# EAGLE board educ-8 (EAGLE 6.6.0), part 1 of 5
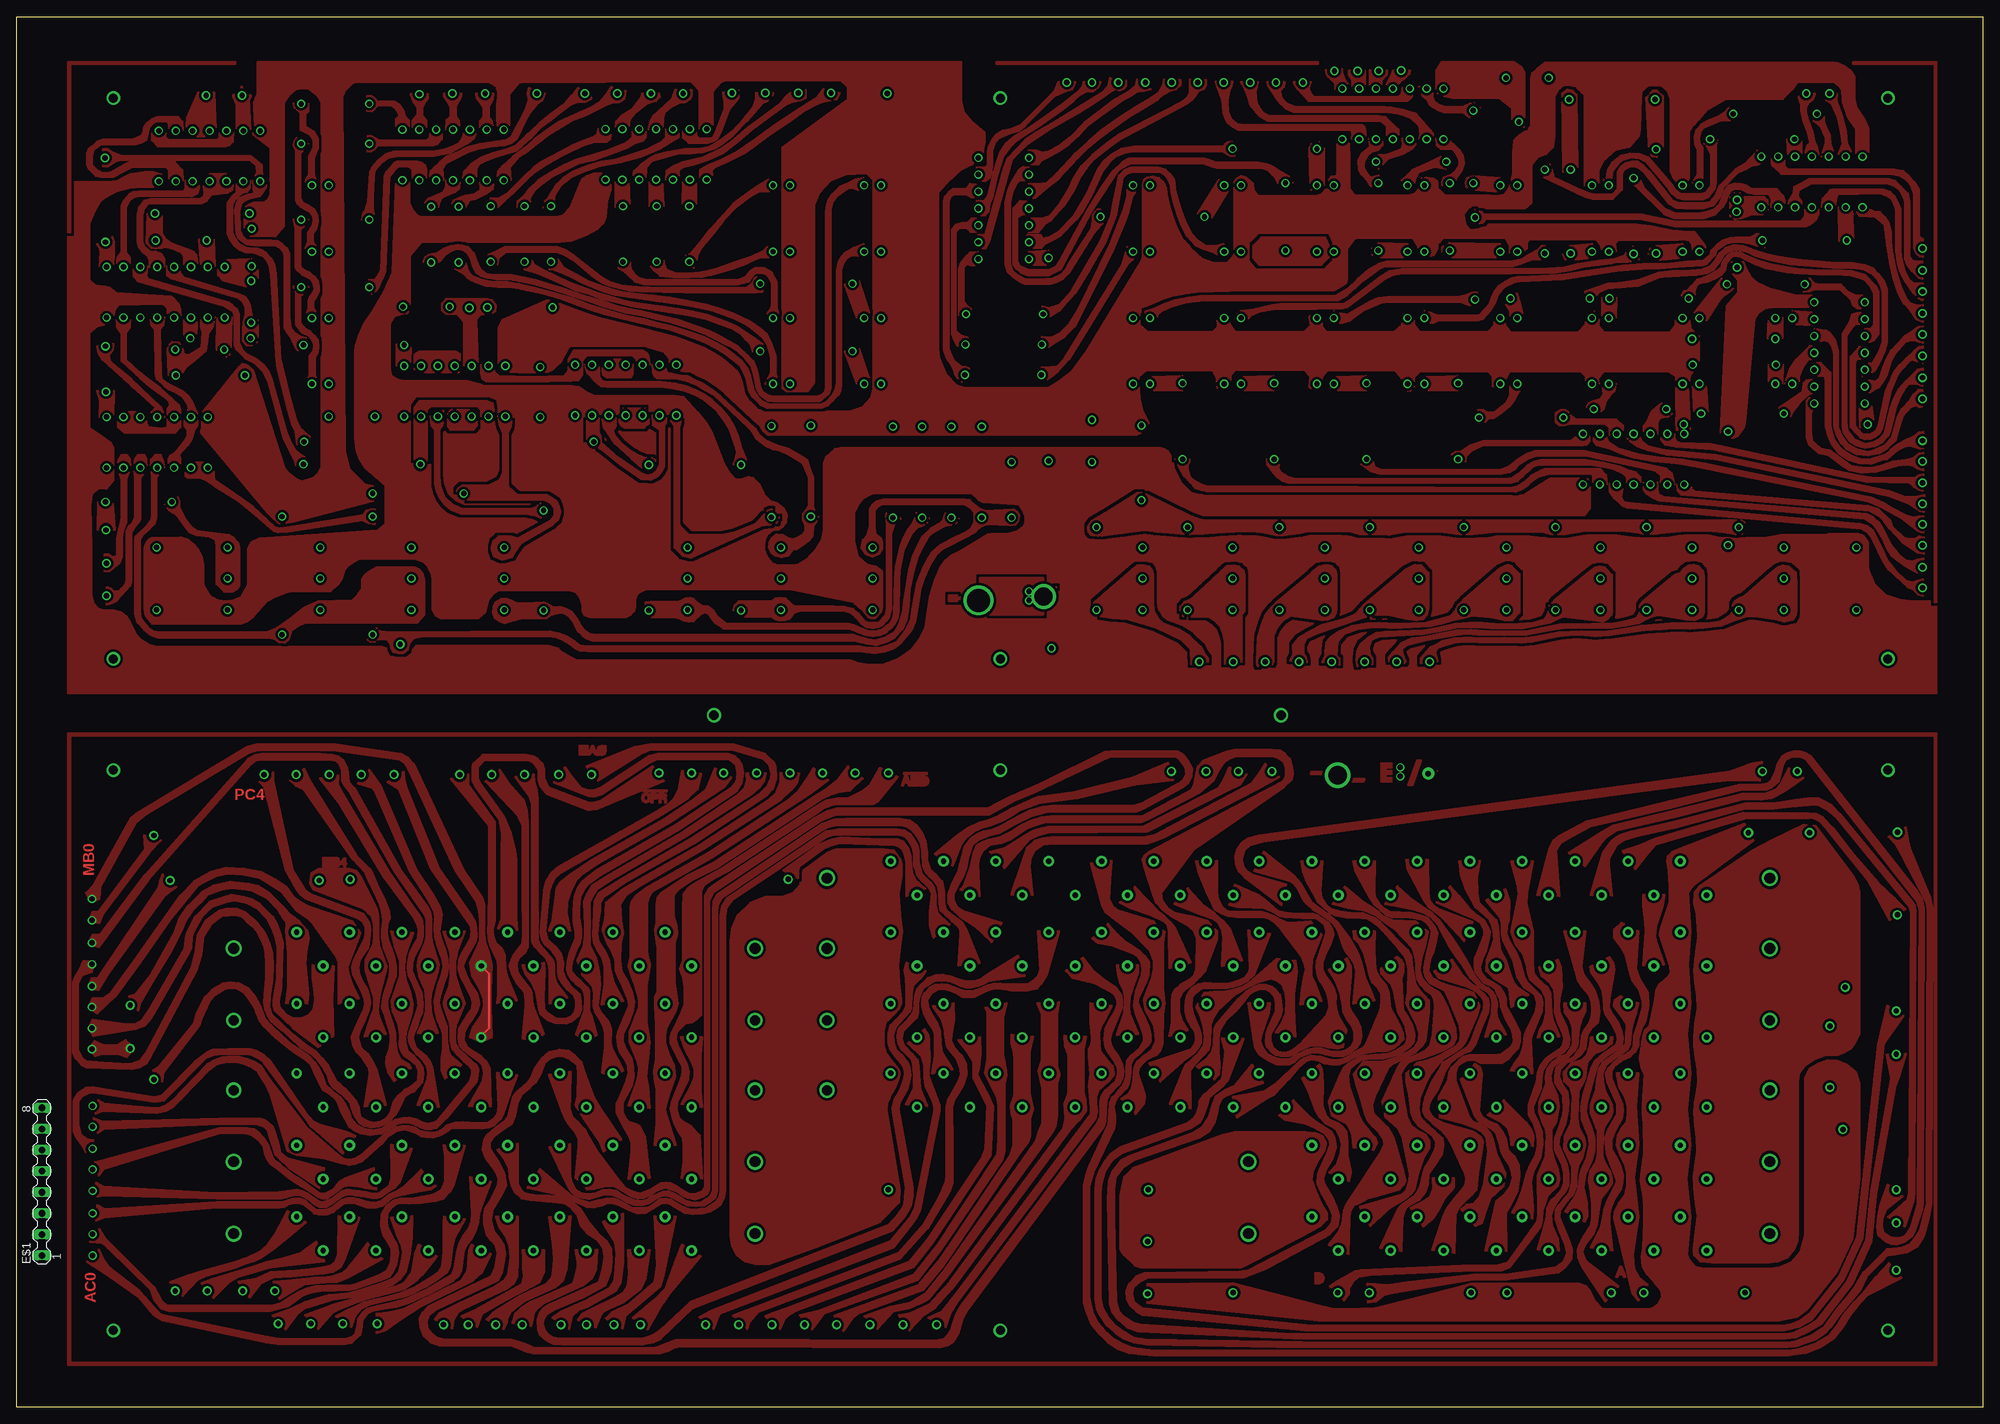
[diagram p0: board, top side]

Size 295.99 x 209.38 mm. Coordinates in mm from the lower left corner, seen from the top.
Outline: 0,0 0,209.38 296,209.38 296,0 0,0
Copper layers (1+16): Top 0.035mm / dielectric 1.5mm / Bottom 0.035mm
Design rules "16mils": minimum track width 16mil, minimum drill 32mil, track to track 15mil, track to pad 10mil, pad to pad 10mil, via to via 10mil, smd to smd 10mil, copper to edge 13mil, drill to drill 10mil, minimum pad ring 10mil, minimum via ring 8mil, stop-mask expansion 0mil, vias tented up to drill 0mil, thermal gap 10mil

## Footprints (pad centres in the part's own frame; a part is rotated, then mirrored left to right if it is on the bottom)
MA08-1 = drill 1.016 long: 1 -12.7,0; 2 -9.525,0; 3 -6.35,0; 4 -3.175,0; 5 0,0; 6 3.175,0; 7 6.35,0; 8 9.525,0

## Placement (x,y rotation side)
E$1  [MA08-1]  3.81,35.56 90 top

## Library data of the parts
E$1 = dec-con

## Tracks (layer width: path | path; a pad name or v marks a point on that pad's centre or on a via)
MB0  (via drill 0.81 pad 1.19, 0.81 pad 1.52, 0.81 pad 1.61)
  Top 0.339: v69.94,55.71 69.94,55.97 71.12,57.15 71.12,65.28 v69.94,66.46
  other vias: 11.35,76.54
  pour Top: 67.23,80.94 59.77,96.86 58.93,97.79 57.83,98.38 48.01,99.82 36.15,99.82 34.71,99.4 18.2,89.49 17.27,88.73 11.68,78.74 10.5,77.47 11.18,76.2 12.45,76.54 12.62,78.4 17.95,88.05 19.47,89.32 34.88,98.55 36.32,98.98 47.5,98.98 57.66,97.54 58.5,97.03 59.1,95.93 66.12,80.86
  pour Top: 71.54,55.71 71.37,60.28 71.37,62.82 71.54,66.72 71.04,68.5 70.53,69.93 70.36,71.2 70.36,75.61 70.1,76.71 67.23,80.94 66.12,80.86 69.26,76.2 69.6,74.85 69.77,73.32 69.77,70.19 69.34,69.17 68.24,66.89 68.58,65.02 69.68,63.16 70.27,61.64 70.36,60.37 70.02,59.01 68.75,57.23 68.24,55.8 69.85,55.12
MB1  (via drill 0.81 pad 1.19)
  other vias: 11.35,73.32
  pour Top: 21.67,85.34 20.07,83.65 12.95,74.25 12.45,72.9 10.92,73.15 11.43,74.59 12.36,74.59 19.39,83.99 19.22,86.11
MB2  (via drill 0.81 pad 1.19)
  other vias: 11.35,69.93
  pour Top: 56.98,80.6 50.12,92.71 49.36,93.64 49.02,94.4 49.02,95.93 48.68,96.69 48.01,97.37 46.99,97.54 36.91,97.54 35.9,97.37 35.31,96.86 19.81,79.42 12.36,69.34 10.92,69.85 11.43,71.12 12.45,71.12 12.95,71.63 19.39,80.18 26.59,88.31 34.88,97.62 35.98,98.21 36.91,98.38 45.72,98.38 47.5,98.21 48.43,97.96 49.19,97.37 49.78,96.18 49.95,94.15 50.8,93.22 57.83,80.86
MB3  (via drill 0.81 pad 1.19)
  other vias: 11.35,66.72
  pour Top: 30.65,74.85 29.63,74.17 28.53,73.32 27.26,71.04 26.92,68.66 26.33,66.12 19.56,53.42 18.63,52.15 17.1,51.65 13.12,51.9 10.5,52.07 9.74,52.75 9.23,53.76 9.23,63.92 9.82,65.02 10.58,65.36 11.35,65.53 11.68,67.06 10.08,67.23 9.48,65.87 8.89,64.85 8.55,64.01 8.55,53.42 8.89,52.58 9.82,51.56 10.58,51.22 17.36,50.97 18.46,51.22 19.47,51.82 19.98,52.58 27.01,65.79 27.77,68.16 28.11,70.87 29.29,72.81 30.9,74
MB4  (via drill 0.81 pad 1.19)
  other vias: 11.35,63.42
  pour Top: 22.01,80.26 21.59,79.16 21.42,78.23 12.62,65.11 12.28,64.69 11.35,64.6 10.92,63.25 12.28,62.82 13.8,65.36 22.18,76.96 23.03,77.64 24.05,78.32
MB5  (via drill 0.81 pad 1.19)
  other vias: 11.35,60.28
  pour Top: 40.56,78.32 38.86,79.5 36.75,80.6 34.29,81.03 31.58,81.2 29.29,80.6 26.75,79.16 24.72,77.05 21.17,72.14 17.78,67.31 14.14,62.31 13.04,61.55 11.43,61.55 10.92,60.2 12.11,59.35 14.82,61.89 18.54,66.89 23.03,73.41 27.26,78.57 28.45,79.25 30.06,80.01 31.83,80.35 34.12,80.26 36.66,79.67 39.88,77.64
MB6  (via drill 0.81 pad 1.19)
  other vias: 11.35,57.07
  pour Top: 36.58,75.78 35.39,76.45 34.12,76.88 32.34,77.13 31.41,76.88 29.04,76.12 26.92,73.91 25.65,71.46 25.48,70.44 25.32,69 20.15,60.11 18.88,58.25 18.03,57.74 16.59,57.66 11.43,58.34 10.92,57.15 11.51,55.96 17.86,56.98 19.3,57.49 20.15,58.59 26.08,68.75 26.25,69.26 26.33,70.87 26.59,71.54 27.69,73.58 28.36,74.34 29.55,75.44 31.58,76.12 32.85,76.28 34.71,75.95 36.15,75.18
MB7  (via drill 0.81 pad 1.19, 0.81 pad 1.35)
  other vias: 11.35,53.93 17.1,54.02
  pour Top: 16.59,52.75 15.32,53.26 12.87,53.26 11.85,52.92 10.92,53.85 11.77,55.12 13.04,54.53 15.32,54.61 16.43,55.29 17.53,54.1
S$1  (via drill 1.44 pad 1.78)
  other vias: 190.33,104.22
S$2  (via drill 1.44 pad 1.78)
  other vias: 104.99,104.22
S$3
  pour Top: 288.71,101.43 288.71,6.43 288.97,6.43 288.97,101.43
S$4
  pour Top: 288.71,101.43 8.04,101.43 8.04,101.18 288.71,101.18
S$5
  pour Top: 8.04,6.43 8.04,101.43 7.79,101.43 7.79,6.43
S$6
  pour Top: 288.97,6.69 7.79,6.69 7.79,6.43 288.97,6.43
S$7
  pour Top (rank 2): 120.23,24.13 113.28,21.59 111.17,21.59 109.64,22.01 108.46,22.94 107.7,24.38 107.44,25.74 107.44,70.19 107.7,72.05 108.63,74.17 110.49,75.95 112.78,76.88 115.32,76.88 116.92,77.47 118.03,78.66 118.19,80.35 118.7,81.36 120.99,83.06 122.09,83.74
  pour Top (rank 2): 122.09,83.74 123.44,83.99 130.56,83.99 132,83.82 133.18,82.21 133.18,80.01 132.76,77.3 133.01,74.08 133.27,71.54 133.01,69.43 132.67,66.63 132.84,63.92 133.1,62.06 133.18,60.37 132.42,59.35 131.23,58 130.47,56.56 130.47,54.95 131.06,53.34 132.59,51.56 133.1,49.7 132,47.58 131.06,45.89 130.98,44.7 132.93,32.85 132.84,30.9 129.96,27.94 120.23,24.13
S$8
  pour Top: 97.03,89.15 101.01,91.69 102.53,93.13 103.04,95.33 100.16,95.84 99.65,92.88 99.06,91.78 97.96,90.68 96.44,89.75
S$9
  pour Top: 99.14,87.63 107.7,93.3 108.37,94.23 108.54,95.42 108.29,96.77 107.36,97.54 96.44,97.62 95.25,97.11 87.97,92.29 86.87,91.95 86.19,92.03 80.94,94.06 82.55,96.35 83.4,95.17 84.92,93.22 86.02,92.88 86.87,92.88 87.88,93.22 95.25,98.04 96.52,98.38 107.1,98.38 108.12,97.96 108.63,97.54 109.14,96.69 109.39,95.59 109.14,94.06 108.29,92.71 99.74,87.04
S$10
  pour Top: 97.45,88.48 101.85,91.44 103.89,93.05 105.16,96.18 107.53,94.83 106.51,93.39 98.3,88.05
S$11
  pour Top: 100.25,86.53 108.37,92.03 109.64,93.3 109.98,94.32 109.9,95.42 112.78,95.42 112.52,94.4 111.84,93.39 110.66,92.37 100.67,85.94
S$12
  pour Top: 103.29,83.99 115.06,91.52 116.59,92.96 117.52,94.06 117.77,95.42 114.98,95.5 114.98,94.06 114.38,92.54 113.03,91.27 102.79,84.58
S$13
  pour Top: 102.02,85.01 112.95,92.2 113.79,93.13 114.3,94.74 114.22,96.35 113.96,97.2 112.69,98.38 107.95,99.82 95.25,99.82 93.13,99.4 85.77,96.52 87.55,94.4 93.98,98.47 95.33,99.06 107.78,99.06 112.27,97.71 113.37,96.6 113.62,95.5 113.54,94.66 113.11,93.64 111.68,92.2 101.6,85.68
S$14
  pour Top: 104.14,83.48 116.16,91.36 117.6,92.63 119.13,94.83 119.97,96.18 122.17,94.49 119.46,92.46 104.56,82.72
S$15
  pour Top: 104.9,81.96 120.48,92.2 121.84,93.05 123.61,94.4 125.14,96.52 127.34,94.66 125.48,92.88 123.7,92.63 122.51,92.29 121.24,91.69 105.41,81.28
S$16
  pour Top: 106.93,80.69 120.57,89.58 121.5,90.25 122.68,90.68 123.61,90.85 128.95,90.85 129.62,91.19 132.59,94.91 129.96,96.27 128.44,93.64 127.42,92.79 125.31,91.78 123.53,91.69 121.92,91.36 120.06,90.25 106.17,81.11
S$17
  pour Top: 77.64,90.93 77.22,92.03 76.28,93.3 75.1,94.91 77.81,95.25 77.89,94.15 78.32,92.88 78.4,91.69
S$18
  pour Top: 76.96,88.31 76.79,89.83 76.28,91.52 73.91,94.15 72.73,95.93 70.61,94.23 75.61,88.98 76.2,87.71
S$20
  pour Top: 47.75,66.38 47.5,61.64 47.58,58.76 47.67,55.96 45.38,54.27 41.66,57.15 38.95,59.69 38.69,60.45 38.69,61.38 39.2,64.43 39.29,69.26 39.03,70.78 38.52,72.05 37.76,73.49 36.15,75.18 36.58,75.78 38.52,73.83 39.12,72.81 39.71,71.29 40.05,69.93 39.88,66.12 39.79,63.25 39.45,61.21 39.54,60.28 40.56,59.1 41.57,58.59 42.93,58.59 43.94,59.01 44.7,59.94 44.96,61.38 44.87,62.48 44.53,64.69 44.53,66.55
S$21
  pour Top: 56.39,71.63 56.9,69.51 57.74,67.31 57.74,64.85 56.81,62.15 56.47,61.21 56.64,59.77 57.4,57.91 57.74,56.05 57.66,54.53 58,53.59 58.42,52.92 59.27,52.41 60.2,51.56 60.54,50.72 60.45,49.19 59.18,48.09 58.42,47.84 57.4,46.91 56.73,45.89 56.3,44.37 55.71,43.52 54.78,43.01 53.76,42.84 52.83,43.1 51.9,43.6 51.65,44.03 51.48,45.21 51.05,46.14 49.36,48.01 48.68,48.6 48.09,49.11 47.5,50.21 46.74,51.65 45.97,52.58 45.13,53.51 43.6,54.53 42.42,55.46 41.57,56.13 39.79,57.83 38.35,59.27 38.02,60.2 38.1,61.89 38.44,64.35 38.52,66.46 38.44,68.33 38.02,69.85 37.34,71.46 36.07,73.07 34.37,74.51 33.1,75.01 31.58,75.01 30.65,74.85 30.9,74 31.83,74.08 32.85,74.17 33.87,73.91 34.63,73.15 35.48,72.47 36.24,71.63 36.83,70.53 37.34,69.34 37.51,68.33 37.59,66.8 37.59,64.69 37.34,62.06 37.25,60.88 37.42,60.03 37.76,59.1 38.35,58.17 39.88,56.81 41.23,55.63 42.67,54.27 44.03,53.42 45.3,52.32 46.06,51.31 46.82,50.04 47.16,49.02 47.58,48.26 48.85,47.24 49.7,46.48 50.29,45.8 50.55,44.96 50.88,43.94 51.65,42.84 52.41,42.42 53.42,42.16 54.53,42.33 55.54,42.76 56.39,43.35 56.98,44.03 57.57,45.13 58.34,46.74 59.18,47.33 59.86,47.58 61.04,48.94 61.21,50.21 61.13,51.14 60.45,52.15 59.77,52.92 58.84,53.59 58.5,54.78 58.5,55.71 58.67,56.73 59.44,59.44 59.61,60.71 59.27,62.48 58.59,64.26 58.34,65.96 58.42,67.82 58.84,69.26 59.69,71.46
S$22
  pour Top: 50.97,40.89 49.61,41.49 45.64,42.5 44.7,43.01 43.43,44.45 38.02,52.32 37.25,53 36.07,53.68 35.22,53.93 31.75,53.93 31.75,53.26 34.54,53.26 35.48,53.09 36.49,52.58 37.25,51.9 43.86,43.01 44.37,42.33 45.3,41.57 49.11,38.27
S$23
  pour Top: 32.6,21.76 27.94,20.49 25.74,19.81 23.11,18.8 24.98,16.76 27.35,19.3 28.45,19.81 32.85,21
S$24
  pour Top: 35.81,21.25 32.94,20.32 29.46,19.3 27.86,18.71 29.63,16.51 32.17,18.97 33.27,19.64 35.9,20.4
S$25
  pour Top: 51.56,28.53 49.28,22.18 48.68,21.08 47.58,20.4 46.31,20.15 44.62,20.07 44.79,20.83 46.23,21.08 47.41,21.42 48.01,21.93 48.43,22.94 48.51,28.79
S$26
  pour Top: 55.03,17.95 50.63,16.68 48.85,16.43 47.41,16.17 43.26,14.9 42.33,14.14 40.47,11.77 38.52,13.8 41.4,14.82 43.43,15.83 45.38,16.43 46.99,16.85 48.68,17.02 50.04,17.19 51.73,17.61 54.78,18.63
S$27
  pour Top: 57.32,18.2 52.24,16.76 49.11,15.83 47.67,15.41 46.74,15.07 43.43,13.89 45.38,11.85 47.58,14.31 48.51,14.73 50.88,15.75 52.41,16.26 57.57,17.61
S$28
  pour Top: 59.77,17.27 58.25,16.68 56.73,16.34 53,15.41 51.82,14.82 50.88,13.72 50.38,12.11 48.09,13.72 49.87,14.65 51.31,15.32 52.32,15.83 53.85,16.17 55.71,16.59 57.57,17.1 59.69,17.95
S$29
  pour Top: 91.02,40.39 87.8,45.04 86.87,46.65 85.94,49.11 85.43,50.55 85.01,51.99 84.07,52.92 83.06,53.68 81.7,53.85 80.18,53.42 79.08,52.58 78.06,51.05 77.47,49.53 76.96,48.85 75.18,47.33 74.76,46.74 74,43.77 73.24,42.93 72.05,41.99 70.87,40.98 70.36,40.22 70.19,38.86 70.7,37.51 71.63,36.24 72.31,35.14 72.56,34.46 72.47,33.53 72.14,32.6 71.2,30.9 70.53,29.89 70.36,28.87 70.36,27.6 70.78,26.08 71.46,25.15 72.14,24.38 72.39,23.2 72.05,20.91 71.54,19.73 62.82,15.58 63.16,14.73 72.39,19.13 72.98,20.24 73.58,23.03 73.32,24.38 72.64,25.48 71.8,26.5 71.37,28.19 71.63,29.8 72.98,32.09 73.66,33.53 73.41,35.22 72.56,36.91 71.63,38.27 71.2,39.03 71.2,39.88 71.8,40.81 73.32,41.91 74.51,42.67 75.01,44.03 75.44,45.97 76.03,47.16 77.3,48.18 78.15,48.94 78.82,50.12 79.42,51.73 80.35,52.58 81.11,52.83 82.21,52.92 83.14,52.58 83.82,51.99 84.41,51.39 84.5,50.29 84.41,46.82 84.16,45.55 85.51,43.35 87.8,39.96 88.39,38.52
S$30
  pour Top: 85.34,15.92 81.96,14.39 80.69,13.46 83.14,11.85 83.57,13.63 84.75,14.73 85.68,15.07 85.85,15.16 85.43,15.92
S$31
  pour Top: 137.16,26.92 133.1,22.44 111.59,14.39 110.24,12.78 109.98,11.85 107.87,13.8 109.14,14.31 111.59,15.24 132.67,23.2 136.65,27.69
S$32
  pour Top: 137.84,24.72 135.04,21.17 117.43,14.65 116.59,14.14 115.57,13.38 114.89,11.85 112.78,13.72 113.79,14.14 115.99,14.9 134.45,21.93 137.16,25.23
S$33
  pour Top: 263.99,13.12 265.35,13.12 267.97,13.63 269.49,14.73 273.9,20.32 276.35,25.48 277.37,34.37 277.37,48.68 276.86,50.46 275.51,51.56 274.07,52.15 272.63,52.24 271.19,51.73 269.92,50.97 269.24,49.61 269.24,25.91 268.56,23.45 267.21,21.84 265.51,21.08 263.99,20.83
S$34
  pour Top: 263.82,21.84 265.09,22.01 266.53,22.61 267.55,23.79 268.05,25.06 268.14,26.5 268.14,49.02 268.31,50.29 269.16,51.48 270.68,52.49 272.12,53 274.07,53.09 275.08,53.42 276.1,54.02 276.78,55.03 277.37,56.3 277.37,77.55 277.2,78.57 276.44,80.01 271.78,86.28 270.76,87.55 269.07,87.71 264.24,85.34
S$35
  pour Top: 139.7,20.66 136.91,17.19 134.54,15.75 131.66,15.16 127.68,13.72 129.62,11.85 132,14.48 134.28,14.9 136.4,15.83 137.24,16.34 140.12,19.81
S$36
  pour Top: 139.02,23.54 135.64,19.22 121.58,14.14 119.72,11.77 117.94,13.89 120.99,14.65 135.13,19.98 138.6,24.38
S$37
  pour Top: 139.19,22.44 135.81,18.37 123.11,13.8 124.46,11.51 125.81,13.46 126.66,14.14 136.48,17.7 136.99,18.29 139.45,21.34
S$38
  pour Top: 134.54,28.62 131.57,24.98 104.65,14.56 102.79,13.55 104.9,11.85 105.58,13.72 105.92,14.14 132,24.13 134.96,27.86
S$39
  pour Top: 268.48,98.72 269.16,98.55 270,98.04 286,77.72 286.77,76.54 287.1,75.18 286.94,30.82 286.85,29.97 285.75,26.67 285.33,25.82 284.14,24.89 282.96,24.55 282.19,24.64 281.35,24.98 280.25,25.99 280.08,27.09 280.25,28.79 280.59,30.31 281.69,33.53 283.89,31.75 281.35,29.8 280.84,28.45 280.75,27.09 281.01,26.25 282.02,25.57 283.21,25.48 284.06,25.65 284.73,26.42 285.24,27.09 286.17,30.48 286.51,75.01 286.09,76.2 269.49,97.45 269.07,97.79 268.48,97.96
S$40
  pour Top: 190.42,75.61 184.91,79.76 183.98,80.69 183.56,81.87 183.47,82.97 183.81,83.99 184.49,85.01 185.42,85.68 187.2,86.11 255.35,95.33 258.06,95.76 261.28,96.94 262.72,97.2 262.38,94.4 258.15,94.49 255.02,94.15 187.62,85.17 185.76,84.67 184.74,83.74 184.4,82.47 184.66,81.36 185.42,80.52 186.01,80.18 191.09,78.74
S$41
  pour Top: 266.78,8.55 268.31,8.72 270.85,9.57 272.88,10.75 274.24,12.53 275.08,13.97 276.69,15.92 278.55,17.86 279.91,19.56 281.86,21.67 283.72,19.47 278.64,16.93 277.03,15.16 276.01,13.97 274.91,12.11 273.56,10.41 271.44,9.06 269.32,8.21 268.14,8.04 266.62,7.87
S$42
  pour Top: 190.75,93.39 191.94,94.49 192.11,95.42 191.94,96.69 191.69,97.62 190.92,98.38 190.16,98.89 188.98,98.98 183.3,98.98 182.29,98.72 178.56,97.28 177.8,96.52 177.55,95.08 177.21,93.64 176.95,92.96 178.05,92.54 180.17,94.4 181.02,96.01 181.78,97.2 182.54,97.71 183.64,98.04 189.23,98.04 190.08,97.71 190.84,97.03 191.09,96.35 191.09,94.91 190.67,94.32 190.42,94.06
S$43  (via drill 1.35 pad 1.78)
  other vias: 281.69,11.6
S$44  (via drill 1.35 pad 1.78)
  other vias: 281.69,95.93
S$45  (via drill 2.79 pad 3.05)
  other vias: 198.88,95.17
S$46
  pour Top: 198.63,94.23 199.05,96.69 197.19,96.69 196.77,94.23
S$47
  pour Top: 197.95,96.44 199.22,96.44 198.88,94.57 197.7,94.57
S$48
  pour Top: 199.73,95.59 200.07,95.59 199.47,93.81 199.14,93.81
S$49
  pour Top: 200.41,95.59 199.81,95.59 200.15,93.81 200.66,93.81
S$50
  pour Top: 197.36,94.57 202.86,94.57 202.78,94.23 197.27,94.23
S$51
  pour Top: 194.82,95.33 194.9,95.67 198.97,95.67 198.88,95.33
S$52
  pour Top: 206.08,96.94 205.49,96.94 205.49,94.23 206.08,94.23
S$53
  pour Top: 206.93,96.94 205.49,96.94 205.49,96.35 206.93,96.35
S$54
  pour Top: 206.93,96.94 205.49,96.94 205.49,96.35 206.93,96.35
S$55
  pour Top: 206.93,95.84 205.49,95.84 205.49,95.33 206.93,95.33
S$56
  pour Top: 206.93,94.74 205.49,94.74 205.49,94.23 206.93,94.23
S$57  (via drill 0.81 pad 0.76)
  other vias: 208.28,95
S$58  (via drill 0.81 pad 0.76)
  other vias: 208.28,96.35
S$59
  pour Top: 211.41,97.37 210.9,97.37 209.55,93.73 210.14,93.73
S$60  (via drill 1.35 pad 1.78)
  other vias: 148.08,11.6
S$61  (via drill 1.35 pad 1.78)
  other vias: 148.08,95.93
S$62  (via drill 1.35 pad 1.78)
  other vias: 14.56,11.6
S$63  (via drill 1.35 pad 1.78)
  other vias: 14.56,95.93
S$64  (via drill 0.81 pad 1.78)
  other vias: 212.51,95.42
S$65
  pour Top: 213.78,95.84 212.85,95.84 212.85,95.08 213.78,95.08
S$66  (via drill 0.81 pad 1.35)
  other vias: 262.81,95.76
S$67  (via drill 0.81 pad 1.35)
  other vias: 179.07,95.76
S$68  (via drill 0.81 pad 1.35)
  other vias: 131.23,95.5
S$69  (via drill 0.81 pad 1.35)
  other vias: 126.24,95.5
S$70  (via drill 0.81 pad 1.35)
  other vias: 121.33,95.5
S$71  (via drill 0.81 pad 1.35)
  other vias: 116.42,95.5
S$72  (via drill 0.81 pad 1.35)
  other vias: 111.42,95.5
S$73  (via drill 0.81 pad 1.35)
  other vias: 106.43,95.5
S$74  (via drill 0.81 pad 1.35)
  other vias: 101.6,95.5
S$75  (via drill 0.81 pad 1.35)
  other vias: 86.53,95.25
S$76  (via drill 0.81 pad 1.35)
  other vias: 81.62,95.25
S$77  (via drill 0.81 pad 1.35)
  other vias: 76.45,95.25
S$78  (via drill 0.81 pad 1.35)
  other vias: 71.54,95.25
S$79  (via drill 0.81 pad 1.35)
  other vias: 66.72,95.25
S$80  (via drill 0.81 pad 1.35)
  other vias: 56.81,95.25
S$81  (via drill 0.81 pad 1.35)
  other vias: 51.9,95.25
S$82  (via drill 0.81 pad 1.35)
  other vias: 47.07,95.25
S$83  (via drill 0.81 pad 1.35)
  other vias: 37.25,95.25
S$92  (via drill 0.81 pad 1.19)
  other vias: 11.43,45.38
S$93  (via drill 0.81 pad 1.19)
  other vias: 11.43,42.25
S$94  (via drill 0.81 pad 1.19)
  other vias: 11.43,38.95
S$95  (via drill 0.81 pad 1.19)
  other vias: 11.43,35.81
S$96  (via drill 0.81 pad 1.19)
  other vias: 11.43,32.6
S$97  (via drill 0.81 pad 1.19)
  other vias: 11.43,29.21
S$98  (via drill 0.81 pad 1.35)
  other vias: 23.88,17.53
S$99  (via drill 0.81 pad 1.35)
  other vias: 28.7,17.53
S$100  (via drill 0.81 pad 1.35)
  other vias: 39.37,12.62
S$101  (via drill 0.81 pad 1.35)
  other vias: 44.28,12.62
S$102  (via drill 0.81 pad 1.35)
  other vias: 49.11,12.62
S$103  (via drill 0.81 pad 1.35)
  other vias: 67.99,12.45
S$104  (via drill 0.81 pad 1.35)
  other vias: 103.72,12.45
S$105  (via drill 0.81 pad 1.35)
  other vias: 108.71,12.45
S$106  (via drill 0.81 pad 1.35)
  other vias: 113.71,12.45
S$107  (via drill 0.81 pad 1.35)
  other vias: 118.62,12.45
S$108  (via drill 0.81 pad 1.35)
  other vias: 123.44,12.45
S$109  (via drill 0.81 pad 1.35)
  other vias: 128.44,12.45
S$110  (via drill 0.81 pad 1.35)
  other vias: 274.91,41.83
S$111  (via drill 0.81 pad 1.35)
  other vias: 282.96,32.77
S$112  (via drill 0.81 pad 1.35)
  other vias: 282.96,20.66
S$113  (via drill 0.81 pad 1.35)
  other vias: 275.25,63.25
S$114  (via drill 0.81 pad 1.35)
  other vias: 272.97,57.4
S$115  (via drill 0.81 pad 1.35)
  other vias: 272.97,48.18
S$116  (via drill 0.81 pad 1.35)
  other vias: 20.66,49.36
S$117  (via drill 0.81 pad 1.35)
  other vias: 20.66,86.11
S$119  (via drill 0.81 pad 1.35)
  other vias: 17.1,60.54
S$120
  pour Top: 252.65,77.55 252.56,75.78 252.9,74.25 253.07,72.22 253.15,70.78 252.9,69.26 252.73,67.39 252.56,65.7 252.73,63.92 252.98,61.98 253.07,60.03 252.73,57.91 252.56,55.8 252.56,54.44 252.81,52.66 253.07,50.8 253.15,49.02 252.9,47.33 252.65,45.8 252.56,44.37 252.73,42.42 252.9,40.64 252.98,38.52 252.73,36.41 252.48,34.8 252.56,33.1 252.81,30.82 253.07,28.87 252.9,27.69 252.73,25.91 252.48,23.88 252.56,22.86 253.49,22.01 255.19,21.84 263.82,21.84 264.24,85.34 261.37,83.82 253.49,78.49
S$121
  pour Top: 261.45,85.34 252.31,78.57 251.54,77.55 251.97,71.63 251.54,66.72 251.97,60.79 251.46,56.13 251.97,50.29 251.46,44.87 251.97,39.54 251.38,34.37 251.97,28.7 251.46,22.94 251.71,22.18 252.65,21.17 253.92,20.83 263.99,20.83 263.99,13.12 196,13.12 170.26,15.75 170.26,18.54 183.05,18.71 195.24,15.49 198.29,14.73 202.44,14.82 204.55,14.9 217.34,18.12 218.95,18.63 235.2,18.63 236.22,18.2 236.81,17.44 237.41,16.17 238.76,14.73 245.45,14.73 246.3,14.9 247.14,15.49 247.73,16.59 247.57,17.61 246.72,18.71 245.45,20.07 244.77,21.25 244.69,22.69 244.86,24.13 245.03,27.86 245.03,29.97 244.94,31.58 244.52,34.12 244.6,35.05 245.03,38.35 244.94,42.76 244.77,44.2 244.77,45.47 245.11,50.12 244.69,51.05 244.35,52.58 244.86,55.96 245.19,56.81 245.87,57.49 246.72,61.47 246.8,62.74 247.31,63.67 248.75,64.94 249,65.36 248.92,66.46 247.57,70.53 247.4,71.2 247.48,71.97 248.84,76.03 248.84,78.4 248.75,80.94 248.5,82.13 248.58,82.97 249.26,83.65 260.1,87.8
S$122  (via drill 0.81 pad 1.44)
  other vias: 269.92,86.53
S$123  (via drill 0.81 pad 1.44)
  other vias: 260.69,86.53
S$124
  pour Top: 245.45,18.46 244.18,19.47 243.42,20.83 243.33,23.03 244.09,28.7 243.42,34.63 244.09,39.54 243.76,45.3 244.09,50.29 240.88,50.29 241.3,48.26 242.06,46.91 242.49,45.8 242.57,45.13 242.57,44.2 242.4,42.93 241.55,41.91 241.05,40.89 240.88,39.54 241.38,38.02 242.15,36.49 242.49,35.39 242.49,33.53 242.15,32 241.22,30.65 240.62,29.46 240.54,28.45 240.96,26.75 243.25,17.27 244.09,16.09
S$125
  pour Top: 241.13,18.2 236.81,21.51 236.05,22.27 235.63,23.45 236.14,24.64 237.32,26.16 237.91,27.6 238.17,29.89 238.51,31.5 239.35,32.6 240.11,33.7 240.11,34.46 239.95,35.39 239.1,36.75 238.68,37.76 238.76,41.49 239.01,42.33 239.95,43.69 240.2,44.53 240.11,45.55 239.18,47.41 238.76,49.11 238.68,50.29 239.27,51.56 240.28,52.41 241.47,53.17 242.49,53.93 242.82,54.69 243.08,57.15 243.42,58.5 243.84,59.61 244.09,60.79 241.38,61.89 240.62,61.3 240.45,60.45 240.96,59.77 241.81,58.67 242.4,57.66 242.32,55.96 242.23,54.69 241.81,54.1 239.44,52.41 238.76,51.9 238.17,50.88 237.91,49.11 237.83,47.84 236.98,45.55 236.98,44.37 237.41,43.26 238,41.66 238,38.02 237.74,36.83 236.9,35.56 236.64,34.21 236.98,32.51 237.24,30.56 237.24,28.7 236.98,27.35 235.88,25.57 235.29,24.55 235.03,23.62 235.12,22.61 235.71,21.17 239.18,16
S$126  (via drill 0.81 pad 1.35)
  other vias: 224.37,17.27
S$127  (via drill 0.81 pad 1.35)
  other vias: 240.03,17.27
S$128  (via drill 0.81 pad 1.35)
  other vias: 244.94,17.27
S$129  (via drill 0.81 pad 1.35)
  other vias: 260.18,17.27
S$130
  pour Top: 236.98,24.13 238.51,26.92 238.76,28.36 239.01,29.72 239.52,31.16 240.88,33.78 240.88,34.29 240.37,35.64 239.35,38.27 239.18,40.47 239.69,41.91 240.96,44.11 240.96,45.72 239.44,49.11 239.27,50.29 239.69,51.14 240.37,51.9 241.55,52.75 242.32,53.17 243.16,53.76 243.42,54.44 243.5,55.96 244.09,57.74 244.77,60.11 244.77,61.21 244.26,62.91 243.33,64.18 242.91,65.36 242.15,68.24 241.64,69.17 240.54,70.7 240.54,71.97 241.55,72.9 244.09,71.63 243.76,66.04 244.26,64.52 245.53,62.4 245.62,60.45 245.19,58.08 244.69,57.32 244.09,55.63 244.09,54.53 243.59,53.51 242.91,52.83 241.72,52.32 240.54,51.39 240.03,50.63 240.03,49.45 241.72,45.55 241.81,44.53 241.64,43.52 240.62,41.74 240.03,40.3 240.03,38.86 240.88,37.42 241.38,36.32 241.81,34.97 241.72,33.87 241.47,32.94 240.54,31.41 240.03,30.31 239.78,29.13 239.78,27.69 240.2,23.62
S$131
  pour Top: 236.05,28.02 236.47,28.79 236.39,30.82 235.88,33.1 236.14,35.14 237.07,37.08 237.49,38.69 237.49,40.47 237.07,42.08 236.47,43.6 236.22,44.53 236.39,45.97 237.83,51.14 238.17,51.9 239.35,52.92 241.38,54.27 241.64,54.61 241.81,55.46 241.55,56.64 241.05,58 240.11,59.27 239.69,60.11 239.78,61.47 240.2,64.18 240.54,65.96 240.37,66.8 239.78,67.73 236.9,66.29 237.07,65.45 237.66,64.69 238.42,63.5 238.68,62.82 238.93,61.55 239.01,59.94 239.27,59.18 240.28,57.57 240.96,56.13 241.05,55.29 240.79,54.61 238.76,53.17 237.66,52.15 237.15,51.22 235.88,46.99 235.54,45.3 235.63,43.52 236.14,42.08 236.64,40.89 236.81,39.62 236.39,37.51 235.71,35.98 235.29,34.71 235.2,33.02 234.7,31.83 233.17,29.55
S$132
  pour Top: 203.45,15.83 204.64,16 205.82,16.93 207.6,17.36 219.37,19.3 224.37,19.3 232.07,20.32 233.17,21.17 234.02,22.35 234.1,23.71 233.76,24.89 232.24,28.53 232.33,29.63 233.17,30.82 234.19,31.92 234.78,33.36 234.78,35.14 235.12,36.58 235.71,37.68 236.14,39.54 235.97,40.47 235.2,41.99 234.95,43.52 235.12,47.67 235.8,48.85 236.14,49.78 236.22,50.63 236.47,51.99 237.83,53.42 238.84,53.85 240.11,54.86 240.2,55.71 236.98,55.71 236.9,54.61 236.47,53.17 235.54,52.24 234.02,51.82 232.92,50.55 233,49.11 233.93,48.09 234.27,46.82 234.19,44.96 234.02,42.84 233.43,41.66 233.09,40.81 233,38.95 233.6,37.68 234.19,36.24 234.19,34.63 234.02,33.27 233.76,32.26 232.75,31.07 232.16,30.4 231.73,29.63 231.73,28.28 232.24,26.75 233.17,24.55 233.43,23.2 232.92,21.93 231.82,21.08 224.11,19.98 219.37,19.98 209.47,18.8 206.33,18.37 204.64,18.54 203.37,18.63
S$133  (via drill 0.81 pad 1.35)
  other vias: 203.62,17.27
S$134  (via drill 0.81 pad 1.35)
  other vias: 218.95,17.27
S$135
  pour Top: 229.02,23.79 229.79,26.33 230.38,28.62 230.46,29.89 230.97,31.07 231.48,31.58 232.58,32.85 233,33.78 233,35.14 232.66,36.49 231.99,37.85 231.56,38.95 231.56,39.88 231.65,40.56 232.07,41.74 232.83,44.03 232.92,45.04 232.83,46.4 232.83,46.99 231.65,48.85 231.65,49.87 231.82,51.14 233.09,52.15 233.93,52.49 234.61,53.09 235.37,54.1 235.54,54.86 235.63,55.88 235.97,56.73 236.73,57.83 237.07,58.59 237.24,59.69 237.15,61.04 236.73,62.06 235.71,63.33 235.03,64.35 234.7,65.62 233,71.63 236.14,71.63 235.54,66.38 235.88,65.11 236.9,63.75 237.57,62.65 238.08,60.96 238.25,59.52 238,58 237.07,57.15 236.47,56.13 236.3,55.29 236.14,54.02 235.37,53.09 234.44,52.32 233.51,51.99 232.33,50.8 232.16,49.78 232.58,48.6 233.43,47.41 233.6,46.14 233.51,44.62 233.17,42.76 232.24,40.72 232.07,39.54 232.75,37.93 233.34,36.49 233.6,35.22 233.6,33.53 233.17,32.51 232.16,31.41 231.31,30.06 230.97,28.96 231.14,27.35 231.99,25.32 232.16,23.62
S$136
  pour Top: 197.7,18.2 198.8,18.97 199.81,19.47 201.51,20.49 202.35,20.66 217.59,21.34 222.76,21.34 224.45,21.76 228.94,27.94 229.11,28.96 229.02,34.88 230.21,37.76 230.38,40.98 230.21,41.91 229.7,43.1 229.19,44.45 229.19,45.89 230.29,48.68 230.21,49.78 230.46,50.88 231.14,51.9 232.49,52.83 233.26,53.09 233.85,53.76 234.27,54.61 234.27,57.23 233.85,58.5 233.09,59.44 233,60.79 236.14,60.79 236.14,59.77 235.54,58.42 235.2,57.15 234.95,54.53 234.53,53.68 233.6,52.75 233,52.49 231.22,51.31 230.89,49.95 231.06,48.85 231.9,46.82 232.16,45.21 231.73,42.93 231.06,41.83 231.06,38.78 231.39,37.34 231.99,35.73 232.24,34.37 231.9,33.27 230.46,31.83 230.04,30.73 229.7,29.63 229.62,28.19 229.36,27.18 224.71,21.08 223.52,20.66 219.37,20.66 203.79,19.98 202.01,19.64 201.08,18.8 200.58,18.03 200.58,17.19 199.81,16.09
S$137  (via drill 0.81 pad 1.35)
  other vias: 183.13,17.27
S$138  (via drill 0.81 pad 1.35)
  other vias: 198.88,17.27
S$139
  pour Top: 195.75,19.98 195.75,18.88 196.09,18.88 196.43,18.97 196.6,19.47 196.43,19.9 196.09,19.98
S$140
  pour Top: 195.5,20.15 196.09,20.15 196.6,19.98 196.77,19.47 196.6,18.88 196.09,18.71 195.5,18.71
S$141
  pour Top: 241.47,20.91 241.72,20.24 241.22,20.24
S$142
  pour Top: 241.55,21.17 241.38,21.17 240.79,19.64 240.96,19.64 241.13,20.07 241.81,20.07 241.98,19.64 242.15,19.64
S$143
  pour Top: 225.13,29.38 225.98,30.9 226.65,32.6 227.16,34.54 227.41,35.39 227.92,36.58 228.68,37.93 229.02,39.37 229.02,40.39 228.77,41.57 228.43,42.76 227.67,44.03 227.67,45.47 227.84,46.23 228.85,49.02 229.02,50.38 229.45,51.48 230.12,52.41 230.89,53 232.16,53.85 232.75,54.53 233,55.46 232.75,56.39 232.07,57.91 231.56,59.52 231.65,61.04 231.48,62.91 230.97,63.75 229.62,64.94 229.19,66.21 231.99,67.39 232.49,66.12 232.58,63.25 232.24,61.55 232.16,60.28 232.33,59.27 232.75,58.42 233.34,57.07 233.76,55.37 233.6,54.36 232.92,53.51 231.99,53 231.31,52.66 230.55,52.07 229.79,50.8 229.53,49.45 229.45,48.09 228.26,45.3 228.35,44.37 229.11,42.76 229.62,41.4 229.7,39.62 229.36,37.68 228.35,35.64 227.92,33.95 228.09,32.26 228.26,30.14 228.18,28.45
S$144
  pour Top: 224.28,23.54 224.2,29.38 224.79,30.31 225.89,32.6 226.23,34.88 226.14,36.41 225.47,37.76 224.45,38.78 224.2,40.39 223.69,41.49 222.84,42.5 221.57,43.1 220.56,43.77 220.13,44.62 220.3,46.57 220.56,50.21 220.3,51.22 219.54,51.73 217.42,49.36 219.54,43.94 220.3,42.93 221.83,42.08 222.76,41.23 223.18,39.88 223.52,38.52 224.03,37.59 224.79,36.41 225.13,35.22 225.21,34.37 224.87,33.19 223.94,32 222.76,30.99 221.06,23.62
S$145
  pour Top: 225.04,39.54 224.96,40.72 224.54,41.91 223.35,43.1 221.49,44.03 223.86,46.23 227.16,42.93 228.01,41.74 228.35,40.81 228.26,39.37
S$146
  pour Top: 244.86,66.55 245.03,68.75 245.28,71.63 245.19,72.98 244.86,75.44 244.86,77.13 248.07,77.13 247.82,75.61 246.8,72.73 246.63,70.95 246.89,69.77 247.99,66.72
S$147
  pour Top: 229.02,55.71 229.36,56.9 229.87,57.83 230.29,59.44 230.29,61.3 230.12,61.89 229.62,62.91 227.84,64.43 227.5,65.53 227.33,66.63 226.82,68.24 225.72,69.68 225.04,71.63 226.14,77.3 225.89,78.91 225.04,82.21 228.26,82.21 227.33,77.39 227.25,75.86 228.26,71.63 228.26,66.63 228.43,65.19 228.94,64.6 230.38,63.33 230.89,62.31 231.06,59.35 231.22,58.17 232.24,55.88
S$148
  pour Top: 228.18,50.29 227.92,55.2 228.01,55.96 229.62,59.77 229.7,61.04 229.45,61.98 227.25,64.09 226.91,64.85 226.31,67.06 225.72,68.5 224.62,70.19 224.28,71.2 224.37,72.64 224.62,73.49 224.71,76.2 224.11,77.98 221.23,76.28 223.35,73.74 223.6,72.98 223.6,71.29 223.77,70.27 224.87,68.24 225.3,67.31 225.89,64.77 226.91,63.33 228.52,62.15 228.94,60.96 228.68,59.52 227.25,56.64 227.08,56.05 226.82,54.1 226.4,52.92 225.55,51.82 224.96,50.72
S$149
  pour Top: 243.67,81.03 245.62,83.57 246.72,84.75 260.35,88.73 269.75,88.73 269.75,89.41 259.84,89.49 246.63,85.6 244.35,84.58 241.81,83.74
S$150
  pour Top: 240.11,77.05 239.69,81.53 239.69,82.63 240.79,84.67 241.98,85.43 243.67,85.94 249.68,87.29 260.18,90.17 264.5,90.17 264.5,90.93 260.27,90.93 249.43,88.14 243.16,86.7 241.47,86.19 240.79,85.77 240.03,85.17 238.84,83.57 238.17,81.28 236.98,77.13
S$151
  pour Top: 233.68,83.48 238.68,86.61 240.45,87.63 249.6,89.83 259.67,92.37 263.14,92.37 264.75,92.96 265.68,93.9 266.78,96.18 268.99,94.74 266.02,92.71 264.16,91.78 262.47,91.52 259.93,91.61 249.6,88.9 240.79,86.87 239.44,85.94 238.42,84.84 236.05,81.53
S$152  (via drill 0.81 pad 1.35)
  other vias: 268.05,95.76
S$153
  pour Top: 228.94,77.13 230.8,84.24 231.31,85.26 232.16,85.94 236.39,88.22 248.75,91.19 259.33,93.73 262.38,93.73 263.65,93.9 264.33,94.57 264.84,95.76 265.09,96.86 265.77,97.96 266.53,98.47 267.55,98.72 268.48,98.72 268.48,97.96 267.29,97.96 266.28,97.54 265.85,96.69 265.26,94.32 264.16,93.3 263.48,93.05 259.76,93.05 248.84,90.25 236.81,87.46 233.51,85.68 232.41,85.01 231.73,83.9 232.24,76.96
S$154
  pour Top: 219.63,27.35 220.56,27.77 220.98,29.04 221.74,31.41 223.77,33.27 224.11,35.14 222.76,38.1 222.25,40.3 221.74,41.32 221.23,41.91 219.96,42.67 219.37,42.93 218.61,43.77 216.58,49.19 216.58,50.46 216.92,51.39 217.51,51.9 218.36,52.32 219.54,52.32 220.39,51.9 223.6,51.9 224.62,52.58 225.98,54.02 226.31,55.2 226.31,56.39 225.72,57.66 224.79,59.35 224.2,60.37 224.2,61.47 223.77,62.4 223.18,63.33 222.33,63.92 221.15,64.52 220.39,65.45 220.3,66.38 220.64,67.65 221.06,68.58 221.57,70.27 221.74,71.54 221.57,72.14 220.9,73.32 219.79,74.08 218.44,75.35 217.09,76.96 215.82,78.4 213.78,76.03 218.1,74.17 219.46,73.58 220.39,72.9 220.81,72.22 220.98,71.54 220.98,71.04 219.88,68.33 219.54,67.56 219.54,66.21 219.63,65.62 219.96,65.02 220.47,64.43 220.98,63.92 222.08,63.42 222.67,62.91 223.01,62.06 223.35,61.47 223.44,60.45 223.77,59.44 224.28,58.34 225.04,57.07 225.3,56.05 225.38,55.03 225.04,54.27 223.52,53.17 222.25,53 218.61,53 217.76,52.75 217.09,52.24 216.07,51.22 215.65,50.38 215.48,49.11 214.12,46.65 214.29,43.69 217.76,42.76 219.63,42.08 220.56,41.57 221.23,40.72 221.4,39.54 221.57,38.69 221.23,36.24 220.9,33.44 220.3,31.67 219.37,30.65 218.27,30.48 217.51,29.8
S$155
  pour Top: 227.58,62.06 226.14,63.08 225.3,64.01 224.87,65.11 224.2,67.23 223.35,68.75 223.1,70.27 223.01,72.39 222.76,73.32 220.13,76.03 219.88,77.39 219.79,79.84 220.3,82.3 217.17,82.21 217.42,80.26 218.19,78.06 219.03,76.37 219.63,75.35 221.74,73.41 222.08,72.73 222.33,71.8 222.42,70.44 222.08,69.26 221.32,67.31 221.23,65.7 222.33,64.69 224.03,63.58 224.71,62.99 225.04,60.28
S$156
  pour Top: 224.2,56.13 222.93,58.5 222.76,59.44 222.84,60.88 222.5,61.98 222.08,62.65 221.66,63.08 221.06,63.33 220.39,63.75 219.46,64.94 218.86,66.12 218.19,67.39 217.09,69.09 215.9,70.87 214.8,72.39 214.12,73.41 213.11,74.34 211.92,75.1 210.14,76.37 207.86,78.4 206.08,75.78 210.31,74.93 211.92,74.42 212.85,73.91 214.12,72.47 214.97,70.78 215.73,69.34 216.66,67.99 217.68,66.55 218.52,65.19 218.95,64.6 219.88,63.58 220.64,62.99 221.49,62.57 221.91,61.98 222.17,61.04 222.08,59.1 221.06,55.8
S$157
  pour Top: 219.12,73.07 214.12,74.93 213.28,75.52 212.68,76.28 212.51,77.39 212.43,82.38 209.21,82.38 209.38,81.11 211.92,76.28 212.6,75.35 213.78,74.42 215.05,73.24 217.85,70.19
S$158
  pour Top: 216.41,23.28 216.58,29.13 217,29.97 217.85,30.9 219.03,32 219.71,32.77 219.96,35.22 220.56,38.78 220.73,39.96 220.39,40.64 219.54,41.32 219.03,41.57 214.8,42.76 213.61,43.35 212.94,44.03 212.51,44.79 212.6,45.72 212.94,46.4 213.78,47.67 214.55,49.36 214.97,50.63 215.65,51.65 216.83,52.66 217.93,53.34 218.86,53.68 219.63,54.69 220.39,57.07 221.49,59.44 221.66,60.62 221.49,61.55 220.9,62.23 219.96,63.08 219.03,63.67 217.51,65.28 216.07,67.39 213.44,65.62 214.12,64.69 218.1,63.42 219.29,62.91 220.05,62.4 220.73,61.55 220.98,60.96 220.9,59.94 219.71,57.15 219.03,55.29 218.36,54.19 217.42,53.59 216.24,52.75 215.82,52.58 214.71,51.9 214.38,51.14 213.02,48.94 212.09,46.57 211.84,45.72 211.75,44.53 212.17,43.77 213.19,42.76 214.55,41.74 215.48,40.64 216.15,39.45 218.02,35.31 218.27,34.37 218.1,33.44 217.51,32.6 216.41,31.41 215.31,29.89 214.8,28.7 213.11,23.71
S$159
  pour Top: 209.89,30.06 211.84,30.99 212.85,31.67 213.28,32.94 213.19,34.46 216.32,34.46 216.32,33.1 214.88,31.41 214.21,29.97 213.19,28.45 211.75,27.26
S$160
  pour Top: 205.32,24.05 207.52,28.79 208.03,29.89 208.53,30.48 209.47,31.07 210.48,31.83 210.9,32.34 211.33,33.27 211.67,34.97 212.09,36.15 212.94,37.42 213.61,38.86 213.7,39.96 213.19,40.89 212.26,41.66 211.16,42.33 210.31,43.35 209.97,44.45 209.63,46.99 209.21,49.02 209.21,50.29 210.82,51.9 212.68,52.32 214.21,52.92 215.22,53.51 216.75,54.36 217.34,55.12 217.42,56.47 217.17,57.74 215.39,62.06 214.97,62.74 213.95,63.33 212.77,63.92 212.17,64.77 211.92,65.53 211.92,66.21 212.09,67.14 212.26,67.9 212.94,70.78 213.02,71.71 212.68,72.47 212.17,73.07 211.58,73.49 209.8,73.74 207.01,73.83 206.16,74.17 205.4,74.85 204.47,75.61 203.71,76.79 201.51,80.77 201.25,82.21 204.47,82.21 204.39,77.64 204.47,76.79 205.06,75.86 205.91,75.01 206.76,74.59 209.89,74.42 211.58,74 212.34,73.66 212.94,73.07 213.61,72.14 213.87,71.37 213.61,69.77 213.28,68.58 212.85,67.65 212.6,66.55 212.51,65.62 213.11,64.6 214.38,63.92 215.65,63.42 218.27,62.74 219.29,62.4 220.22,60.45 219.79,59.1 218.02,54.95 217.51,54.27 216.58,53.59 215.65,53.09 214.71,52.49 213.7,51.31 212.85,50.21 212.26,49.19 211.24,46.82 210.99,45.04 211.24,43.77 211.92,43.01 213.44,41.66 214.63,40.47 214.8,39.54 214.55,38.18 213.61,36.66 212.51,35.14 212.43,33.7 212.01,32.34 211.07,31.24 209.8,30.56 208.96,29.8 208.62,28.7 208.45,23.54
S$161
  pour Top: 203.79,27.35 206.93,30.23 208.96,31.41 209.97,32.26 210.4,32.85 210.99,35.48 211.75,37.68 212.68,39.12 212.68,40.05 212.09,41.06 210.99,41.57 209.97,42.33 209.3,43.69 208.7,47.07 208.28,50.21 208.79,51.05 209.38,51.9 210.23,52.24 211.5,52.58 213.19,53.17 214.88,53.85 216.24,54.61 216.66,55.63 216.58,56.98 215.31,60.37 214.71,61.55 214.12,62.48 213.19,62.99 212.34,63.58 211.58,64.6 211.16,65.79 211.5,67.73 212.09,69.85 212.43,71.54 210.57,73.15 207.09,73.32 205.82,73.83 205.06,74.51 204.22,75.1 202.69,76.12 199.98,78.32 198.12,75.78 200.49,75.18 202.86,74.85 204.05,74.34 204.72,74.08 206.16,72.9 206.59,72.64 207.35,72.14 210.23,69.09 210.57,67.9 210.74,66.72 210.74,65.45 210.9,64.52 211.41,63.58 212.17,62.74 213.02,62.15 213.44,61.47 213.53,60.37 213.19,56.05 212.85,54.53 211.92,53.59 210.74,53 209.38,52.49 208.53,51.99 208.11,51.39 205.57,45.97 206.08,43.77 207.94,42.08 208.62,40.81 209.72,35.14 209.63,34.04 209.3,32.85 208.45,32 202.18,30.23
S$162
  pour Top: 197.53,24.47 199.14,26.5 199.56,27.69 199.81,29.55 200.15,30.48 200.74,31.33 205.49,38.44 205.91,39.54 205.82,40.39 205.15,41.32 204.22,42.25 203.45,43.18 203.03,44.11 202.18,47.07 201.59,48.85 201.34,50.12 202.78,51.99 205.82,52.07 206.93,52.41 208.2,52.83 209.63,53.59 210.48,54.19 211.07,55.2 211.16,56.47 210.74,57.91 209.8,59.52 209.21,60.88 209.47,62.48 209.55,65.96 209.38,66.89 209.04,67.82 208.03,69.09 205.57,71.8 204.81,72.64 204.13,73.15 203.37,73.58 202.52,73.66 200.15,73.74 198.63,74.08 197.61,74.51 196.77,75.27 195.92,76.12 195.41,77.05 194.23,79.16 193.63,80.77 193.38,82.21 196.6,82.21 196.26,77.81 196.43,76.71 197.02,75.78 197.87,75.01 199.05,74.68 201.42,74.34 202.78,74.34 203.54,74 204.55,73.58 205.32,72.98 209.38,68.83 209.97,67.82 210.06,66.55 210.31,64.94 210.57,63.67 210.99,62.99 212.6,61.3 212.6,59.61 212.09,55.29 211.5,54.36 210.57,53.42 209.63,53 207.26,51.82 206.33,50.97 204.47,46.99 204.05,45.55 204.22,44.28 206.33,42.16 206.84,41.4 207.26,40.56 208.79,35.39 209.04,34.21 208.79,33.53 208.2,32.85 204.81,31.83 203.37,31.5 202.27,30.9 201.25,30.4 200.74,29.55 200.66,28.45 200.49,23.11
S$163
  pour Top: 204.22,38.78 204.81,39.79 204.47,40.64 203.62,41.57 202.61,42.84 202.01,44.03 200.58,48.34 200.41,49.95 200.74,51.05 201.59,51.82 202.35,52.32 203.28,52.49 205.66,52.58 206.76,52.75 208.2,53.26 209.63,54.27 210.31,55.12 210.4,56.13 210.14,57.4 209.3,58.93 208.7,59.86 208.45,64.69 208.79,65.62 208.79,66.63 208.45,67.31 207.77,67.82 205.4,66.04 205.49,65.28 206.16,64.52 207.01,63.58 207.35,62.74 207.77,60.37 207.94,59.61 208.28,58.93 209.04,57.49 209.3,56.3 209.47,55.71 209.21,54.86 208.62,54.27 207.6,53.68 206.5,53.26 204.47,53.09 202.86,52.92 202.18,52.75 200.74,51.9 199.9,51.22 199.39,50.21 197.53,45.97 198.04,43.94 199.22,43.26 200.24,42.76 200.74,42.08 201.08,41.06 201.25,39.12
S$164
  pour Top: 200.58,34.12 200.83,35.48 200.32,37.93 200.32,39.88 200.15,41.4 199.56,42.25 199.05,42.67 197.78,43.18 197.02,44.03 196.6,45.3 196.68,48.85 196.51,50.88 196.09,51.56 193.55,49.53 194.56,47.5 195.58,44.7 196.17,43.69 196.93,42.84 198.04,42.33 198.71,41.83 199.22,40.81 199.47,39.62 199.31,38.02 198.8,36.66 197.61,35.39
S$165
  pour Top: 184.32,21.08 169.25,21.08 168.32,21.42 166.71,22.94 166.2,23.79 166.2,31.92 166.45,33.36 166.79,34.71 168.06,35.98 181.69,41.06 183.3,41.4 194.06,41.4 195.5,41.23 196.51,40.89 197.1,39.79 196.85,38.69 196,37.34 195.16,35.73 194.9,34.29 195.58,32.34 196.43,30.48 197.27,29.21 197.27,28.28 196.34,27.43 194.73,26.5 185,21.42
S$166  (via drill 0.81 pad 1.35)
  other vias: 170.26,24.98
S$167  (via drill 0.81 pad 1.35)
  other vias: 170.26,17.1
S$168  (via drill 0.81 pad 1.61)
  other vias: 254.42,23.62
S$169  (via drill 1.61 pad 1.61)
  other vias: 263.91,26.16
S$170  (via drill 0.81 pad 1.61)
  other vias: 246.46,23.62
S$171  (via drill 0.81 pad 1.61)
  other vias: 238.59,23.62
S$172  (via drill 0.81 pad 1.61)
  other vias: 230.63,23.62
S$173  (via drill 0.81 pad 1.61)
  other vias: 222.76,23.62
S$174  (via drill 0.81 pad 1.61)
  other vias: 214.8,23.62
S$175  (via drill 0.81 pad 1.61)
  other vias: 206.84,23.62
S$176  (via drill 0.81 pad 1.61)
  other vias: 198.97,23.62
S$177  (via drill 0.81 pad 1.61)
  other vias: 250.44,28.7
S$178  (via drill 0.81 pad 1.61)
  other vias: 242.57,28.7
S$179  (via drill 0.81 pad 1.61)
  other vias: 234.61,28.7
S$180  (via drill 0.81 pad 1.61)
  other vias: 226.65,28.7
S$181  (via drill 0.81 pad 1.61)
  other vias: 218.78,28.7
S$182  (via drill 0.81 pad 1.61)
  other vias: 210.82,28.7
S$183  (via drill 0.81 pad 1.61)
  other vias: 202.95,28.7
S$184  (via drill 0.81 pad 1.61)
  other vias: 194.99,28.7
S$185  (via drill 1.61 pad 1.61)
  other vias: 185.42,26.16
S$186  (via drill 0.81 pad 1.61)
  other vias: 254.42,34.37
S$187  (via drill 1.61 pad 1.61)
  other vias: 263.91,37
S$188  (via drill 0.81 pad 1.61)
  other vias: 246.46,34.37
S$189  (via drill 0.81 pad 1.61)
  other vias: 238.59,34.37
S$190  (via drill 0.81 pad 1.61)
  other vias: 230.63,34.37
S$191  (via drill 0.81 pad 1.61)
  other vias: 222.76,34.37
S$192  (via drill 0.81 pad 1.61)
  other vias: 214.8,34.37
S$193  (via drill 0.81 pad 1.61)
  other vias: 206.84,34.37
S$194  (via drill 0.81 pad 1.61)
  other vias: 198.97,34.37
S$195  (via drill 0.81 pad 1.61)
  other vias: 250.44,39.45
S$196  (via drill 0.81 pad 1.61)
  other vias: 242.57,39.45
S$197  (via drill 0.81 pad 1.61)
  other vias: 234.61,39.45
S$198  (via drill 0.81 pad 1.61)
  other vias: 226.65,39.45
S$199  (via drill 0.81 pad 1.61)
  other vias: 218.78,39.45
S$200  (via drill 0.81 pad 1.61)
  other vias: 210.82,39.45
S$201  (via drill 0.81 pad 1.61)
  other vias: 202.95,39.45
S$202  (via drill 0.81 pad 1.61)
  other vias: 194.99,39.45
S$203  (via drill 1.61 pad 1.61)
  other vias: 185.42,37
S$204
  pour Top: 265.85,12.28 194.9,12.28 169.42,14.9 168.23,15.83 167.89,17.1 168.15,18.12 169.08,18.97 170.18,19.47 183.39,19.56 184.66,19.56 187.96,20.83 197.61,26.08 198.8,27.26 199.05,28.87 198.71,30.14 197.95,31.75 196.85,33.61 196.68,34.46 197.1,35.9 198.04,37.34 198.63,39.2 198.37,40.47 197.95,41.49 195.41,43.1 194.82,43.6 192.19,46.23 190.08,43.94 191.01,43.26 194.14,42.67 195.5,42.08 196.93,41.23 197.61,40.39 197.78,39.45 197.27,38.1 196.17,35.73 195.92,34.97 195.83,33.78 196.26,32.68 197.87,29.8 198.12,28.96 198.04,27.69 197.44,27.09 196.77,26.5 185.5,20.66 184.07,20.4 169.76,20.15 168.57,19.73 167.56,18.63 167.05,17.44 167.13,16.34 167.64,15.32 168.57,14.48 169.5,13.97 194.06,11.6 266.02,11.6
S$205
  pour Top: 183.13,46.74 187.88,47.58 189.4,48.6 193.04,51.99 193.8,52.58 194.82,52.92 195.41,52.83 196.34,52.75 197.44,52.41 198.63,52.24 199.81,52.49 200.66,52.83 201.51,53.51 202.61,54.02 203.2,54.69 205.32,59.77 205.49,60.96 205.49,62.31 204.98,63.08 204.13,64.01 203.62,65.19 203.28,66.8 202.86,68.24 202.18,69.68 201.42,70.53 201.25,71.63 204.47,71.63 204.39,69.09 204.47,66.89 204.64,65.62 205.23,64.6 206.16,63.5 206.59,62.23 206.67,61.3 206.84,60.03 207.6,58.59 208.28,57.23 208.7,56.13 208.79,55.37 208.11,54.69 207.26,54.02 206.25,53.68 204.55,53.59 203.12,53.34 202.1,53.09 201.25,52.66 200.24,52.07 198.97,51.65 198.04,51.65 196.93,51.82 196.17,52.15 195.24,52.41 194.56,52.32 194.06,52.15 192.96,51.22 191.52,49.45 189.31,47.16 188.3,46.57 183.73,43.69
S$206
  pour Top: 204.39,61.3 203.79,62.74 203.03,64.52 202.44,66.8 201.85,68.5 200.66,70.61 198.88,72.9 197.7,74 196.85,74.59 195.92,75.27 194.9,76.03 194.23,77.13 193.29,78.91 192.19,80.09 187.79,83.65 186.35,80.77 191.77,79.25 192.28,78.91 192.96,78.06 193.63,76.54 194.23,75.78 195.16,74.93 196.34,74.25 197.44,73.49 198.37,72.64 198.88,71.88 199.73,69.43 200.07,68.75 200.91,67.56 201.42,66.8 201.68,65.7 201.25,60.79
S$207
  pour Top: 185.93,51.56 183.39,48.43 182.03,47.84 180.51,46.82 180,45.3 179.49,43.69 178.48,42.16 177.04,41.23 167.64,37.85 166.29,37.17 164.93,35.48 164.42,33.95 164.25,31.41 164.59,15.66 164.93,14.39 165.78,13.29 167.13,12.02 168.91,11.43 192.28,10.41 266.36,10.41 266.45,11.01 192.02,11.01 169.25,12.45 168.06,12.7 166.79,13.55 165.86,14.56 165.52,15.92 165.18,28.28 165.18,32.77 165.44,34.71 166.54,36.15 168.23,37.25 178.05,40.64 179.49,41.57 180.42,43.1 180.76,44.62 180.93,45.55 181.27,46.31 181.95,46.91 183.22,47.41 187.62,48.85
S$208
  pour Top: 184.66,55.46 182.29,49.19 181.69,48.51 179.49,46.65 179.15,45.55 178.48,43.69 178.05,42.93 176.78,42.08 166.37,38.35 165.35,37.59 164.51,36.66 163.75,35.48 163.32,33.78 163.15,32.34 163.15,16.43 163.49,14.9 164.25,13.46 165.27,12.36 166.37,11.51 168.15,10.5 170.01,10.16 193.46,9.82 266.62,9.74 266.62,9.14 189.74,9.14 170.1,9.48 168.23,9.82 166.62,10.41 165.44,11.26 164.17,12.36 163.15,13.89 162.64,14.82 162.39,16.26 162.39,32.94 162.56,34.29 162.98,35.56 163.83,37 164.68,38.1 166.2,39.12 176.28,42.76 177.21,43.52 177.72,44.2 178.05,45.38 178.05,46.06 178.73,47.07 181.53,49.53 181.61,50.29 181.95,53.68 181.44,55.54
S$209
  pour Top: 185.42,60.79 186.27,55.2 186.44,54.27 187.11,53.17 188.21,52.41 189.74,51.65 191.52,51.65 192.45,52.07 193.29,52.83 194.06,53.17 194.99,53.42 196.09,53.42 197.1,53.17 198.2,52.92 199.73,52.92 200.49,53.26 201.68,54.19 202.18,54.95 202.44,55.96 202.27,57.15 201.76,58.34 200.83,59.61 200.58,60.37 200.58,61.64 200.83,65.02 200.83,66.29 200.24,67.56 197.53,65.87 198.2,64.77 198.8,63.58 199.22,62.65 199.56,60.88 199.73,59.61 200.24,58.5 201,57.49 201.42,56.64 201.42,55.2 201,54.36 200.15,53.76 199.31,53.51 197.95,53.51 197.27,53.76 196.26,54.02 195.33,54.02 194.31,53.85 193.38,53.34 191.52,52.41 190.42,52.41 189.23,52.66 188.3,53.17 187.54,54.1 187.2,55.12 187.37,56.22 188.55,59.44 188.64,60.79
S$210
  pour Top: 177.72,51.31 179.15,52.49 179.92,53.42 180.26,54.53 180.34,56.81 180.51,57.49 180.85,57.91 183.9,61.47 185.17,62.65 186.18,63.25 187.11,63.58 187.96,63.58 188.98,63.33 189.57,62.74 190.16,62.06 190.33,61.13 190.5,59.86 190.16,58.76 189.48,57.49 188.72,56.22 188.72,55.12 189.15,54.1 189.91,53.51 190.84,53.34 191.6,53.51 192.19,53.85 193.12,54.61 197.27,59.1 197.61,60.11 197.53,61.38 197.27,62.48 196.77,63.42 196.09,64.35 195.83,65.36 195.66,66.21 195.75,67.06 196,67.73 197.19,71.37 197.1,72.14 196.85,72.73 196.34,73.15 195.66,73.58 194.99,73.66 193.46,73.66 190.92,73.83 190.16,74 189.31,74.51 188.72,74.85 187.79,75.18 186.01,75.27 183.81,75.35 182.54,75.61 183.39,78.66 186.86,77.13 187.96,76.28 189.82,74.76 191.18,74.42 192.7,74.25 195.16,74.25 195.83,74.08 196.68,73.49 197.44,72.9 198.04,72.05 198.2,71.2 197.78,69.85 197.02,68.24 196.6,67.06 196.6,65.87 196.93,65.02 197.61,64.09 198.2,63.16 198.63,61.98 198.54,60.79 198.71,59.77 198.97,58.76 199.64,57.66 200.15,56.73 199.64,54.27 198.8,54.02 197.44,54.19 196.6,54.44 195.58,54.53 194.65,54.44 193.8,54.02 192.96,53.68 192.28,53.17 191.43,52.92 190.33,52.92 189.57,53.09 188.89,53.51 188.21,54.27 188.04,54.95 188.13,56.13 188.47,57.07 189.06,58.42 189.57,59.61 189.57,60.96 189.4,61.81 188.81,62.57 187.96,62.99 187.11,62.99 186.18,62.65 185.5,62.15 184.91,61.38 183.47,59.61 181.86,58.08 181.1,56.73 180.93,55.46 180.93,53.59 181.1,51.73 181.02,50.12 180.34,49.36
S$211
  pour Top: 192.53,55.88 192.36,58.17 192.28,60.45 192.28,62.23 192.53,63.92 192.7,65.62 192.53,67.23 189.74,67.48 186.61,64.77 185.5,63.84 184.57,63.33 183.64,62.99 182.12,62.65 180.26,62.57 178.82,62.4 177.63,60.28 178.22,59.01 178.65,57.49 178.9,55.88 178.73,54.44 177.97,53.34 176.11,51.65 175.77,51.14 173.65,45.72 176.7,45.04 176.61,50.72 177.12,51.39 178.82,53.17 179.41,53.85 179.66,54.69 179.75,57.66 180.09,58.67 180.76,59.69 183.56,62.23 184.23,62.65 185.08,63.16 186.77,64.01 187.96,64.35 188.81,64.6 189.74,64.26 190.58,63.67 191.01,62.48 191.18,61.21 191.09,59.27 190.5,57.83 189.57,56.47
S$212
  pour Top: 193.29,60.71 193.46,62.82 193.8,64.69 194.06,65.96 193.89,66.89 193.46,67.9 190.33,72.05 189.23,73.15 188.55,73.58 187.71,73.83 183.73,73.83 182.46,74 181.44,74.34 180.42,74.93 180.09,75.61 179.07,77.89 177.88,80.69 177.55,82.21 180.68,82.3 180.68,77.55 180.85,76.45 181.36,75.52 182.2,74.76 182.8,74.59 187.37,74.59 188.21,74.34 189.15,74 190.25,73.41 191.26,72.9 192.87,72.98 194.73,73.15 196.43,71.12 195.5,68.83 194.99,67.48 194.9,65.96 194.9,64.85 195.5,63.58 196.43,61.21
S$213
  pour Top: 170.52,51.82 176.87,53.93 177.46,54.78 177.55,55.54 177.46,56.56 176.95,57.32 176.28,58.5 175.94,59.61 175.94,60.54 176.11,61.72 176.45,62.48 177.04,63.16 177.88,63.67 178.73,63.84 179.75,63.84 182.12,63.75 182.96,63.92 184.07,64.26 184.91,64.69 185.59,65.53 185.67,66.21 185.42,71.8 188.64,71.29 186.18,65.02 185.25,64.18 184.07,63.58 182.96,63.33 182.2,63.16 179.15,63.16 178.39,63.08 177.63,62.48 176.95,61.72 176.87,60.45 177.04,59.44 177.46,58.25 177.97,56.98 178.31,55.96 178.31,54.95 177.88,54.19 177.29,53.42 176.11,52.58 172.21,49.11
S$214
  pour Top: 181.44,66.46 181.69,70.78 181.44,72.05 180.93,72.98 180,73.58 178.48,74.17 174.33,75.78 176.36,78.15 178.73,75.52 180.34,74.34 181.61,73.24 182.54,72.14 184.49,67.31
S$215
  pour Top: 176.28,56.73 175.34,58.25 175.01,59.52 175.01,61.47 175.34,62.31 176.11,63.08 177.21,63.92 178.22,64.85 178.82,65.53 180.68,70.53 180.68,71.71 179.24,73.24 176.87,73.91 174.33,74.42 173.23,75.1 172.38,76.28 172.3,77.47 177.12,83.99 179.07,85.26 190.75,93.39 190.42,94.06 170.35,83.57 169.84,83.06 169.5,82.47 169.67,81.62 171.03,77.39 171.62,75.95 172.38,75.01 173.06,74.51 173.91,73.91 175.26,73.15 176.28,72.64 177.12,71.88 177.38,71.46 177.72,70.7 177.63,65.96 177.29,65.11 176.53,64.35 175.18,63.58 174.41,62.91 173.99,62.06 173.91,61.04 173.91,57.91 173.57,55.96
S$216
  pour Top: 173.57,66.12 173.48,71.71 173.23,72.64 172.64,73.24 170.77,74.17 167.64,75.18 166.12,76.03 168.32,78.32 172.13,74.42 172.8,73.91 173.65,73.07 174.33,72.22 176.7,66.97
S$217
  pour Top: 166.29,46.48 167.39,47.16 167.89,47.92 168.15,49.36 168.23,50.55 168.32,51.31 168.74,52.07 169.5,52.75 170.1,53.17 171.03,54.02 171.53,55.03 171.45,56.22 171.2,57.57 169.93,59.94 169.67,61.38 170.26,62.74 170.94,64.52 171.2,66.04 171.2,67.31 170.69,68.66 167.64,71.71 164.93,73.74 163.91,74.59 163.49,75.52 161.71,81.87 164.85,82.3 164.59,79.42 164.42,76.37 164.93,75.44 165.69,74.85 171.11,73.15 172.8,71.54 172.55,69.93 172.55,63.08 172.8,60.79 172.55,59.01 172.47,54.78 172.13,53.68 171.62,53.09 170.86,52.75 170.26,52.49 169.25,51.48 168.91,51.05 168.83,50.12 168.99,49.36 169.5,48.09 169.84,46.82 169.67,45.8 168.4,44.2
S$218
  pour Top: 164.25,72.81 165.78,71.12 167.13,69.93 169.08,68.66 169.76,67.99 170.43,67.06 170.35,65.19 170.1,64.26 169.59,63.16 168.91,61.72 168.74,60.96 169.08,60.03 169.67,58.84 170.35,57.32 170.69,56.13 170.69,55.12 170.26,54.44 169.33,53.51 168.06,52.49 167.64,51.65 167.64,50.29 167.47,48.94 167.05,48.01 166.2,47.16 165.52,46.4 165.1,45.38 165.18,44.79 165.35,44.03 165.35,42.84 165.18,41.99 162.14,35.56 161.8,34.46 161.46,33.27 161.46,16.68 161.63,15.58 162.05,14.05 162.73,12.7 163.66,11.6 165.18,10.24 166.37,9.57 167.89,8.97 169.42,8.72 171.2,8.55 266.78,8.55 266.62,7.87 171.2,7.87 169.42,7.96 167.47,8.21 165.78,8.81 164.25,9.82 163.07,11.01 161.8,12.62 161.12,14.31 160.7,15.75 160.7,33.44 160.95,34.8 161.46,36.15 164.34,42.5 164.51,44.45 164.59,45.8 164.93,46.65 165.61,47.33 166.45,48.34 166.79,48.85 167.05,49.78 167.05,50.97 167.13,52.07 167.39,52.49 167.81,53 169.16,54.19 169.67,55.12 169.67,55.8 169.5,56.73 168.4,59.44 168.23,60.45 168.32,61.64 168.49,62.57 169.42,65.02 169.5,66.04 169.33,67.06 168.83,67.9 168.15,68.33 164.93,69.51 162.81,69.93 161.97,70.61
S$219
  pour Top: 168.83,56.22 167.56,59.27 167.47,60.2 167.56,61.81 168.15,63.58 168.83,65.45 168.83,66.55 165.61,66.55 165.78,65.28 166.12,64.01 166.71,62.74 166.88,61.81 166.88,60.62 166.71,59.18 165.61,56.05
S$220